# Altium PCB Main_Board_PCB.PcbDoc
Units mil, origin at the board's own origin, x right, y up, seen from the top; angles counter-clockwise.
Board outline 5435 x 1500 mil, 4 copper layers (Top Layer, Layer 1, Layer 2, Bottom Layer), stack 23.756 mil thick; 55 components, 28 nets, 237 pads, 73 vias.
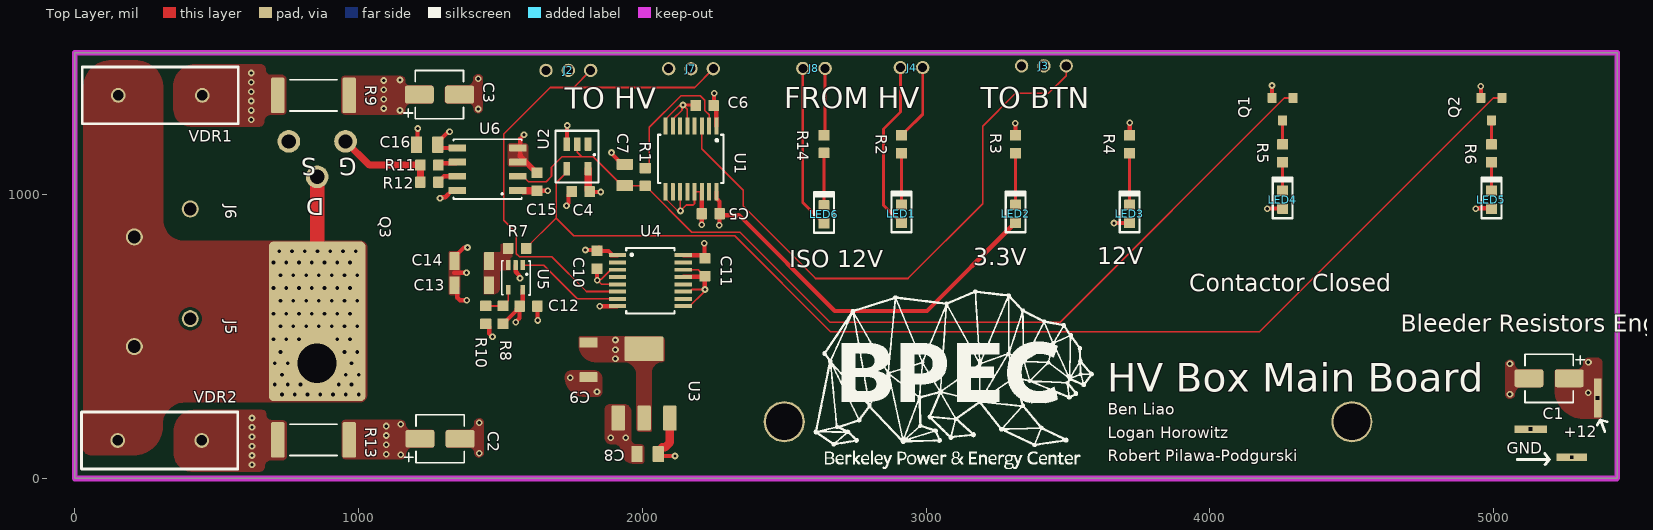
[diagram p0: Top Layer view]
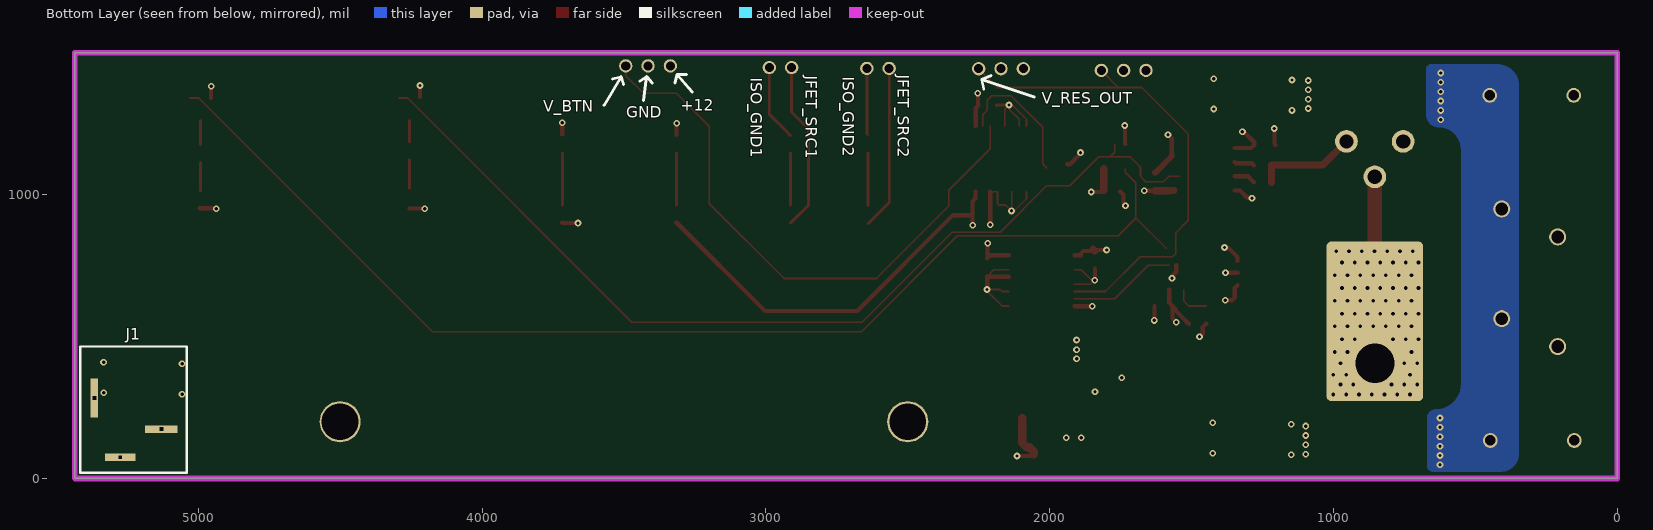
[diagram p1: Bottom Layer view, seen from below]
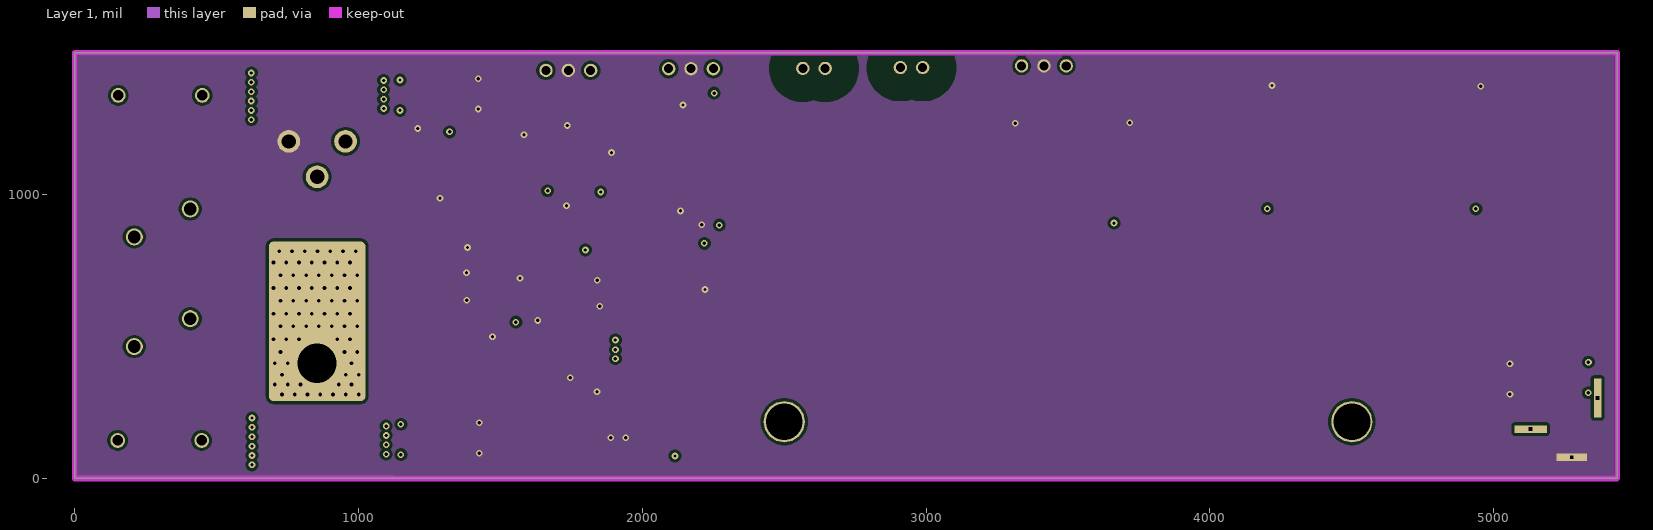
[diagram p2: Layer 1]
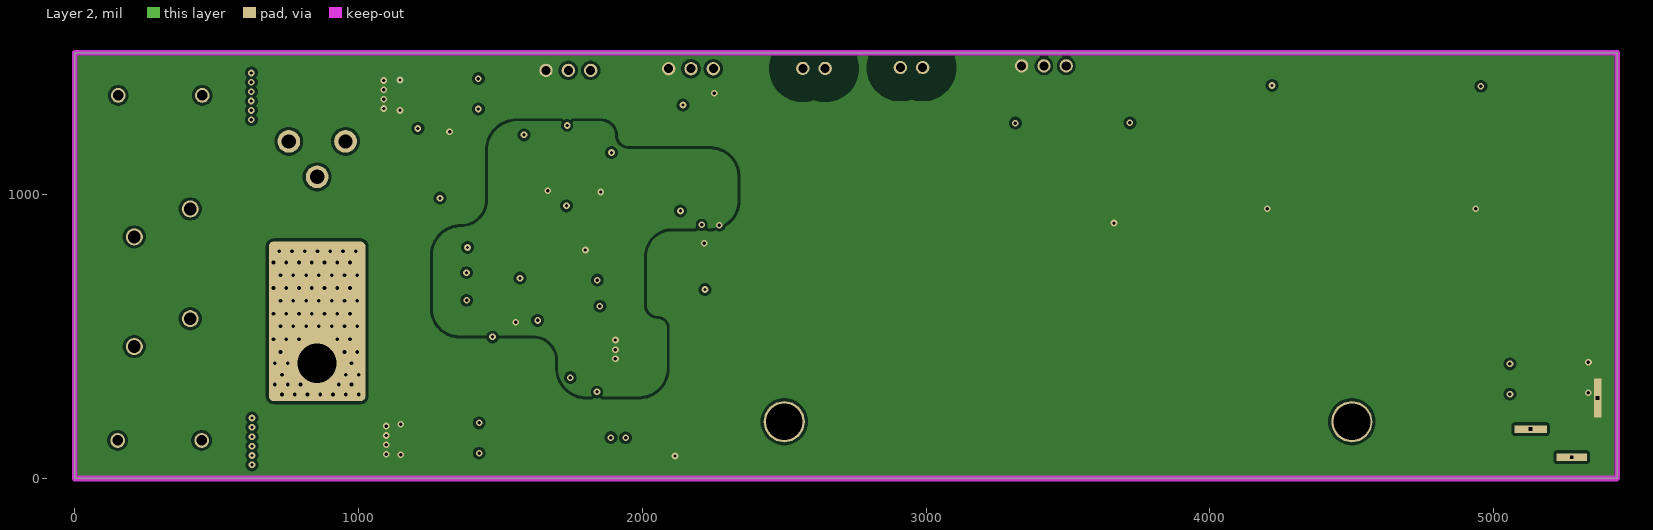
[diagram p3: Layer 2]
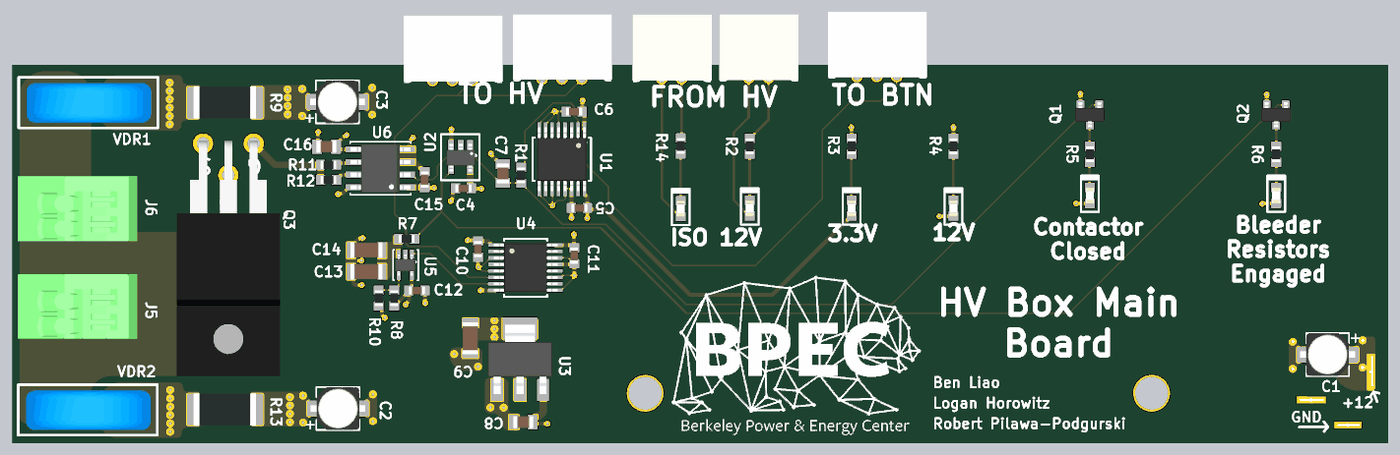
[diagram p4: 3D render of the assembled board from above, using the file's embedded part models]

## Layer stack, top to bottom
Top Solder: solder mask 0.4, Solder Resist, Dk 3.5
Top Layer: signal copper 1.4
Dielectric 2: prepreg 2.8, PP-006, Dk 4.1
Layer 1: signal copper 1.378
Dielectric 1: dielectric 12.6, FR-4, Dk 4.8
Layer 2: signal copper 1.378
Dielectric 3: prepreg 2.8, PP-006, Dk 4.1
Bottom Layer: signal copper 1.4
Bottom Solder: solder mask 0.4, Solder Resist, Dk 3.5

## Board outline
5435,1500 0,1500 0,0 5435,0

## Design rules (kind name [scope] priority, off if disabled: settings)
BoardOutlineClearance [All] p1: gap=9.84 ignorepadtopadclearanceinfootprint=FALSE
Clearance Clearance_HV [InNetClass('High Voltage') vs InNetClass('High Voltage')] p1: gap=96 ignorepadtopadclearanceinfootprint=FALSE
Clearance Clearance_HV_TO_LV [InNetClass('High Voltage') vs InNetClass('Low Voltage')] p2: gap=96 ignorepadtopadclearanceinfootprint=TRUE
Clearance Clearance_HV_TO_ISO [InNetClass('High Voltage') vs InNetClass('Isolated')] p3: gap=96 ignorepadtopadclearanceinfootprint=TRUE
Clearance Clearance_ISO_TO_LV [InNetClass('Isolated') vs InNetClass('Low Voltage')] p4: gap=96 ignorepadtopadclearanceinfootprint=TRUE
Clearance Clearance_Edge [OnLayer('Keep-Out Layer')] p5: gap=0 ignorepadtopadclearanceinfootprint=FALSE
Clearance [All] p6: gap=10 ignorepadtopadclearanceinfootprint=FALSE except(0: Arc-Hole Track-Hole SMDPad-Hole THPad-Hole Via-Hole Fill-Hole Poly-Hole Region-Hole Text-Hole; 5: Arc-Arc Arc-Track Arc-SMDPad Track-Track Track-SMDPad SMDPad-SMDPad; 5.98: SMDPad-Fill SMDPad-Poly SMDPad-Region; 7.87: Via-Via)
ComponentClearance [All] p1: gap=3.94 collisioncheckmode=3 verticalgap=3.94 showdistances=FALSE
Height [All] p1: minheight=0 maxheight=3000 prefheight=500
HoleSize [All] p1: absolutevalues=TRUE maxlimit=248.03 minlimit=7.87 maxpercent=80.000 minpercent=20.000
HoleToHoleClearance [All] p1: gap=19.68 allowstackedmicrovias=TRUE
MinimumAnnularRing [All] p1: minimumring=5.12
MinimumSolderMaskSliver [All] p1 off: minsoldermaskwidth=7.87
PlaneConnect [All] p1: planeconnectstyle=Direct reliefexpansion=20 reliefentries=4 reliefconductorwidth=10 reliefairgap=10
PolygonConnect [All] p1: connectstyle=Direct reliefconductorwidth=39.37 reliefentries=4 polygonreliefangle="90 Angle" airgapwidth=9.84
RoutingVias [All] p1: holewidth=11.81 width=23.62 viastyle="Through Hole" minholewidth=11.81 minwidth=23.62 maxholewidth=248.03 maxwidth=393.7
SolderMaskExpansion [All] p1: expansion=4 istentingtop=FALSE
Width [All] p1: maxlimit=393.7 minlimit=5 preferedwidth=6
24 further rules are at their usual default settings.

## Classes and differential pairs
net class Isolated: ISO_GND1 ISO_GND2 JFET_SOURCE1 JFET_SOURCE2 NetLED1_1 NetLED6_1
net class "Low Voltage": +3V3 +12 GND NetC13_2 NetJ5_1 NetJ5_2 NetLED2_1 NetLED3_1 NetLED4_1 NetLED5_1 NetQ1_1 NetQ2_1 NetQ3_1 NetR1_1 NetR8_2 NetR11_1 NetR12_1 NetS1_1 NetU4_7 V_BTN V_CONT V_RES V_RES_OUT

## Components (designator, comment, footprint, x,y, rotation, side; value= is the part's Value field where it differs from the comment)
C1 "10uF" ALUM_CAP 5195,353 r0 top
C2 "10uF" ALUM_CAP 1287,140 r180 top
C3 "10uF" ALUM_CAP 1285,1353 r180 top
C4 "1 uF, 50 V" 0603_CAP 1751,1011 r0 top
C5 "1 uF, 50 V" 0603_CAP 2209,933 r0 top
C6 "1 uF, 50 V" 0603_CAP 2188,1314 r0 top
C7 "47nF,0805" 0805_CAP 1938,1107 r270 top
C8 "10uF" 0805_CAP 1981,86 r0 top
C9 "22uF" 1206_CAP 1810,357 r90 top
C10 "1 uF, 50 V" 0603_CAP 1840,739 r90 top
C11 "1 uF, 50 V" 0603_CAP 2220,713 r90 top
C12 "1 uF, 50 V" 0603_CAP 1630,607 r180 top
C13 "470nF,1206" 1206_CAP 1338,681 r0 top
C14 "470nF,1206" 1206_CAP 1338,766 r0 top
C15 "100nF" 0603_CAP 1629,1077 r270 top
C16 "10uF" 0805_CAP 1204,1176 r0 top
J1 "J_Barrel_Jack" PWR_JACK 5228,284 r180 bottom
J2 "JST3" JST_3 1660.3,1438 r0 top
J3 "JST3" JST_3 3336.3,1454 r0 top
J4 "JST2" JST_2 2909,1448 r0 top
J5 "Phoenix" PHOENIX_CONNECTOR_SMALL 209.76,464.71 r90 top
J6 "Phoenix" PHOENIX_CONNECTOR_SMALL 209.76,851.38 r90 top
J7 "JST3" JST_3 2092.6,1444 r0 top
J8 "JST2" JST_2 2565.3,1445 r0 top
LED1 "Red" 0603_LED 2913,964 r270 top
LED2 "Red" 0603_LED 3315,964 r270 top
LED3 "Red" 0603_LED 3717,964 r270 top
LED4 "Blue" 0603_LED 4256,1014 r270 top
LED5 "Blue" 0603_LED 4992,1014 r270 top
LED6 "Red" 0603_LED 2640,962 r270 top
Q1 "Logic FET" SOT23 4256,1262 r0 top
Q2 "Logic FET" SOT23 4992,1262 r0 top
Q3 "FET" TO-220 954,1188 r180 top
R1 "10k" 0603_RES 2010,1094 r270 top
R2 "3.3k" 0603_RES 2913,1209 r270 top
R3 "698" 0603_RES 3315,1209 r270 top
R4 "3.3k" 0603_RES 3717,1209 r270 top
R5 "3.3k" 0603_RES 4256,1177 r270 top
R6 "3.3k" 0603_RES 4992,1177 r270 top
R7 "100k" 0603_RES 1590,811 r180 top
R8 "1kOhm, 0.1%" 0603_RES 1509,545 r90 top
R9 "0, 2512" 2512_RES 841,1350 r0 top
R10 "3kOhm, 0.1%" 0603_RES 1448,608 r270 top
R11 "51" 0603_RES 1281,1104 r180 top
R12 "51" 0603_RES 1281,1044 r180 top
R13 "0, 2512" 2512_RES 841,136 r0 top
R14 "3.3k" 0603_RES 2640,1210 r270 top
U1 "U_Level_Shifter" TSSOP-16 2171,1126 r270 top
U2 "Inverter" SOT23-5 1771,1135 r270 top
U3 "LDO" SOT223-3 2006,213 r270 top
U4 "U_Level_Shifter" TSSOP-16 2028,697 r0 top
U5 "U_Comparator" SC70 1578.6,751.6 r180 top
U6 "U_Isolated_Gate_Drive" GATE_DRIVER 1454.5,1090 r180 top
VDR1 "Varistor, 47V" VARISTOR 301,1350 r0 top
VDR2 "Varistor, 47V" VARISTOR 299,134 r0 top

## Footprints (in the part's own frame and the unit in brackets; to place one, negate y for a bottom-side part, rotate by r counter-clockwise, add the part's x,y. Pads: shape width x height; smd on the part's side, far side on the other; paste and mask are expansions set on the pad)
0603_CAP [mil] "SMD 0603 Capacitor Footprint"
  rrect10% 37x39 smd: 1(0,0) 2(63,0)
  body extent 0,-15 63,16, height 32
0603_LED [mil] "SMD 0603 LED Footprint"
  rrect10% 37x39 smd: 1(0,0) 2(63,0)
  silkscreen extent -47,-35 96,35, body extent 0,-16 63,16, height 43
0603_RES [mil] "SMD 0603 Resistor Footprint"
  rrect10% 37x39 smd: 1(0,0) 2(63,0)
  body extent 0,-16 63,16, height 18
0805_CAP [mil] "SMD 0805 Capacitor Footprint"
  rrect10% 39x57 smd: 1(0,0) 2(75,0)
  body extent -2,-25 77,25, height 49
1206_CAP [mil] "1206 SMD Capacitor Footprint"
  rrect10% 35x63 smd: 1(0,0) 2(122,0)
  body extent -2,-31 124,32, height 62
2512_RES [mil] "2512 Resistor Footprint"
  rrect25% 49x125 smd: 1(-126,0) 2(126,0)
  silkscreen extent -83,-55 83,55, body extent -125,-63 123,63, height 24
ALUM_CAP [mil] "25 V Aluminum Electrolytic Cap"
  rrect25% 102x63 smd: 1(-71,0) 2(71,0)
  silkscreen extent -85,-85 125,85, body extent -108,-84 108,85, height 213
GATE_DRIVER [mil] "Isolated Gate Driver Footprint 8-SOIC"
  rrect10% 61x24 smd: 1(-106.5,75) 2(-106.5,25) 3(-106.5,-25) 4(-106.5,-75) 5(106.5,-75) 6(106.5,-25) 7(106.5,25) 8(106.5,75)
  silkscreen extent -120,-105 120,105, body extent -118,-97 118,97, height 69
JST_2 [mil] "2-pin JST Header Footprint, PH series"
  round 47 hole 32: 1(0,0) 2(78.7,0)
  body extent -116,-14 197,252, height 197
JST_3 [mil] "3-pin JST Header Footprint, PH series"
  round 47 hole 32: 1(0,0) 2(78.7,0) 3(157.4,0)
  body extent -115,-10 277,256, height 197
PHOENIX_CONNECTOR_SMALL [mil]
  round 60 hole 45: 1(0,0) 2(98.4,-197)
  body extent -49,-285 207,188, height 516
PWR_JACK [mil] "Barrel Jack Footprint"
  rrect10% 27x138 hole 12 square: 1(-138,0)
  rrect10% 107x27 hole 12 square: 2(-47,-209)
  rrect10% 114x27 hole 12 square: 3(98,-110)
  silkscreen extent -188,-264 187,181, body extent -179,-253 175,168, height 551
SC70 [mil] "IC 6-pin SC70 Footprint"
  rrect10% 16x35 smd: 1(0,0) 2(25.6,0) 3(51.2,0) 4(51.2,86.6) 5(0,86.6)
  silkscreen extent -26,-16 74,105, body extent -13,3 65,85, height 43
SOT23 [mil] "SOT23 Footprint"
  rrect10% 31x35 smd: 1(0,0) 2(37,79) 3(-37,79)
  body extent -59,-9 59,89, height 47
SOT23-5 [mil] "SOT23 5-pin footprint"
  rrect10% 47.6x23.2 smd: 1(-43.3,37.4) 2(-43.3,0) 3(-43.3,-37.4) 4(43.3,-37.4) 5(43.3,37.4)
  silkscreen extent -90,-77 92,74, body extent -52,-56 58,58, height 57
SOT223-3 [mil] "SOT223 3-pin Footprint"
  rrect10% 87x47 smd: 1(0,-91) 2(0,0) 3(0,91)
  rrect10% 87x138 smd: 4(-244,0)
  body extent -259,-128 17,128, height 65
TO-220 [mil] "Power FET Footprint TO-220-3"
  round 80 hole 50: 1(0,0) 2(100,125) 3(200,0)
  round 25 hole 13 paste-99999 mask+4: 4(-46,892) 4(-46,822) 4(-41,742) 4(-41,652) 4(-41,562) 4(-41,472) 4(-36,387) 4(-21,857) 4(-21,782) 4(-16,697) 4(-16,607) 4(-16,517) 4(-16,427) 4(-1,892) 4(-1,822) 4(4,742) 4(4,652) 4(4,562) 4(4,472) 4(9,387) 4(24,857) 4(29,697) 4(29,607) 4(29,517) 4(29,427) 4(44,892) 4(49,652) 4(49,562) 4(49,472) 4(54,387) 4(74,607) 4(74,427) 4(74,517) 4(89,892) 4(94,652) 4(94,562) 4(94,472) 4(99,387) 4(119,607) 4(119,427) 4(119,517) 4(134,892) 4(139,652) 4(139,472) 4(139,562) 4(144,387) 4(159,857) 4(164,607) 4(164,697) 4(164,427) 4(164,517) 4(179,892) 4(184,652) 4(184,472) 4(184,562) 4(189,387) 4(204,857) 4(204,782) 4(209,607) 4(209,697) 4(209,427) 4(209,517) 4(224,822) 4(224,892) 4(229,652) 4(229,742) 4(229,472) 4(229,562) 4(234,387) 4(249,857) 4(249,782) 4(254,607) 4(254,697) 4(254,427) 4(254,517)
  rrect10% 341x563 hole 138 copper offset 0,-148 paste-99999: 4(100,782)
  body extent -105,-10 305,921, height 181
TSSOP-16 [mil] "TSSOP-16 Footprint"
  rrect10% 61x14 smd mask+3: 1(-116,89.8) 2(-116,64.2) 3(-116,38.6) 4(-116,13) 5(-116,-12.6) 6(-116,-38.2) 7(-116,-63.8) 8(-116,-89.4) 9(116,-89.4) 10(116,-63.8) 11(116,-38.2) 12(116,-12.6) 13(116,13) 14(116,38.6) 15(116,64.2) 16(116,89.8)
  silkscreen extent -85,-116 85,115, body extent -126,-98 126,98, height 43
VARISTOR [mil] "Varistor Footprint"
  round 52 hole 37: 1(-148,0) 2(148,0)
  silkscreen extent -275,-100 275,100, body extent -244,-80 248,78, height 610

## Part data
C1 C2 C3: library part C_10uF_AlElec, "Capacitor SMD Aluminum Electrolytic 10 uF"
C4 C5 C6 C10 C11 C12: library part C_1uF_0603, "Capacitor SMD MLCC 1 uF, 0603, 50 V"
C7: library part C_47nF_0805, "Capacitor SMD MLCC 47 nF 0805, C0G/NP0"
C8 C16: library part C_10uF_0805, "Capacitor SMD MLCC 10 uF 0805"
C9: library part C_22uF_1206, "Capacitor SMD MLCC 22 uF 25 V 1206"
C13 C14: library part C_470nF_1206, "Capacitor SMD MLCC 470 nF 1206, C0G/NP0"
C15: library part C_100nF_0603, "Capacitor SMD MLCC 100 nF 0603"
J1: "Jack 12 V Barrel Jack Power Plug"
J2 J3 J7: library part J_JST_3, "Jack JST 3-pin"
J4 J8: library part J_JST_2, "Jack JST 2-pin", System=Connector
J5 J6: library part J_Phoenix_Small, "Phoenix Connector, Female, 2 position, 2 A, 250 V per position"
LED1 LED2 LED3 LED6: library part LED_0603_Red, "LED SMD 0603 Red"
LED4 LED5: library part LED_0603_Blue, "LED SMD 0603 Blue"
Q1 Q2: library part Q_NFET, "N-Channel Logic FET SOT23-3"
Q3: library part Q_NFET_150V, "N-Channel Power FET 150 V 100 A"
R1: library part R_10kOhm_0603_1%, "Resistor 10 kOhm 0603 1%"
R2 R4 R5 R6 R14: library part R_3300Ohm_0603_1%, "Resistor 3.3 kOhm 0603 1%"
R3: library part R_698Ohm_0603_0.5%, "Resistor 698 Ohm 0603 0.5%"
R7: library part R_100kOhm_0603_0.5%, "Resistor 100 kOhm 0603 0.5%"
R8: library part R_1kOhm_0603_0.1%, "Resistor 1 kOhm 0603 0.1%"
R9 R13: library part R_0Ohm_2512, "Resistor 0 Ohm 2512"
R10: library part R_3kOhm_0603_0.1%_1, "Resistor 3 kOhm 0603 0.1%"
R11 R12: library part R_51Ohm_0603_1%, "Resistor 51 Ohm 0603 1%"
U1 U4: "IC 6-in-1 level shifter"
U2: library part U_Inverter_1, "IC Single Inverter"
U3: library part U_LDO_12V_3V3, "IC LDO Fixed Output 3.3V, input up to 12 V, SOT223-3 Package"
U5: "IC 3.3V Comparator Push-Pull"
U6: "IC Isolated Gate Drive 3-15 V Output Supply Split Output"
VDR1 VDR2: library part VDR_47V, "Varistor, 47 V, 500 A, 10 mm Disc Through-Hole"

## Free pads (board coordinates)
  round 145 hole 130: 1(2500,200) 2(4500,200)

## Via types
v1: diameter 23.62, hole 11.81, Top Layer to Bottom Layer, 73 vias

## Nets (pads, with @x,y where several pads share a name; then routed paths per layer and width w, separated by ;. In a path a pad name is that pad's centre, name@x,y a point inside that pad or via, vN(x,y) a via of type N, cw(c..) or ccw(c..) an arc to the next point about the centre after c; other vN are vias at no path point)
+3V3: C4.2 C5.2 C9.2 C10.2 C12.2 C15.2 LED2.2 R8.1 U1.16 U2.5 U3.2 U3.4 U4.1 U5.5 U6.1 | length 2008.6
  Top Layer w15: R8.1 1510,545 1521,556 1521,557 1556,592 1556,597 C12.2@1566,607 ; v1(1554,551) 1554,552 1567,565 C12.2 1578,618 1578,627.19 1578.6,627.79 U5.5 ; C15.2 1629,1013.74 v1(1666.15,1013.74) ; v1(1799.21,805.23) 1836.77,805.23 cw(c1836.77,802) C10.2 ; C4.2@1809.3,1015.7 ccw(c1815.26,1015.7) 1815.26,1009.74 v1(1853.15,1009.74) ; C10.2@1841,802 1880.21,802 1889,793.21 1889,787.3 1889.5,786.8 U4.1 ; U1.16 2260.8,987.5 2272,976.3 C5.2 2272,928 2340,928 2678,590 3003,590 3314,901 LED2.2 LED2.2@3316,901 ; v1(2271,892.81) 2271.5,893.31 C5.2@2271.5,928
  Top Layer w25: U6.1 1578.5,1015 1579.5,1014 C15.2 ; U2.5 1809.3,1090.8 C4.2@1809.3,1015.7 ; C10.2 1841,802 1847,808 C10.2@1847,809
  other v1: 1905,422 1905,454 1905,488
+12: C1.2 C2.2 C3.2 C6.2 C8.2 C11.2 C16.2 J1.1 J2.1 J3.1 J7.1 LED3.2 LED4.2 LED5.2 R9.2 R13.2 U1.1 U3.3 U4.16 U6.5 | length 766.9
  Top Layer w15: v1(1320.68,1221.38) 1319.03,1219.73 1313.73,1219.73 1279,1185 C16.2 1290,1165 U6.5 ; C8.2 2062.62,79.38 v1(2114.68,79.38) ; U4.16 2144.5,786.3 2209.7,786.3 C11.2@2219.2,776.8 ; v1(2218.4,828.58) 2219.2,827.78 C11.2@2219.2,776.8 ; C11.2 C11.2@2219.2,776.8 ; v1(2253,1358) 2252,1357 2252,1315 C6.2 2260.3,1304.7 2260.3,1242.5 U1.1 ; v1(3662,900) 3716,900 LED3.2 ; v1(4202,951) LED4.2 ; v1@4941,952 LED5.2@4995,952
  Top Layer w30: C8.2 2056,95 2070.43,109.43 2079.43,109.43 2097,127 U3.3
  other v1: 1149,84 1097.16,85.68 1097.16,118.68 1097.16,151.68 1097.16,184.68 1149,191 5333,302 5333.64,409.64 4937,950 1146,1297 1088.16,1303.68 1088.16,1336.68 1088.16,1369.68 1088.16,1402.68 1146,1404
GND: C1.1 C2.1 C3.1 C4.1 C5.1 C6.1 C7.1 C8.1 C9.1 C10.1 C11.1 C12.1 C13.1 C14.1 C15.1 C16.1 J1.2 J2.2 J3.2 J7.2 Q1.3 Q2.3 Q3.3 R3.1 R4.1 R10.2 U1.5 U1.7 U1.8 U1.9 U1.11 U1.13 U1.14 U2.3 U3.1 U4.3 U4.5 U4.8 U4.9 U4.11 U4.13 U4.14 U5.2 U6.3 U6.4 U6.8 | length 2372.7
  Top Layer w6: U4.5 1855.83,684.4 1841.23,699 v1(1841,699) 1844.37,702.37 1855.27,702.37 1888.5,735.6 U4.3 ; U1.9 2081.6,986.5 2121.87,946.23 ; U1.8 2081.6,1265.5 2128.73,1312.63 v1@2139.63,1312.63 ; U1.7 2107.2,1265.5 2139.63,1297.93 v1@2139.63,1312.63 ; U1.11 2133.52,1009.28 2133.52,943.57 v1(2134.23,942.86) 2155.38,964 2179,964 2184,969 U1.13 U1.14 ; U4.9 2167.5,607.6 2214.32,654.42 2214.32,654.95 2220.39,661.02 v1(2220.39,665.78) 2174.48,665.78 2167.5,658.8 U4.11 ; U4.14 2196.4,735.6 C11.1@2219,713 ; U1.5 2158.4,1300.6 v1(2143,1316) v1@2139.63,1312.63 ; C11.1@2216.5,710.5 C11.1@2219,713 ; C11.1@2220.19,712.81 2219.19,712.81 C11.1@2219,713
  Top Layer w10: v1(2143,1316) 2186,1316 C6.1
  Top Layer w15: C16.1 1207.28,1179.28 1207.28,1231.79 v1(1208.93,1233.44) ; v1(1287,988) 1290,991 1305.5,991 1329.5,1015 U6.8 ; 1337.51,724.56 1378,724.56 1378,724 1380,724 v1(1380,725) ; C13.1 1348,671 1348,637 1357,628 v1(1381,628) ; C14.1 1338,780 1372,814 v1(1384,814) ; R10.2 1449,545 1460,534 1460,511 v1(1472,499) ; U5.2 1553.5,751.1 1553.5,728.51 1567.35,714.66 1567.35,707.65 v1(1569,706) ; 1570,1140 1570,1198 v1(1583,1211) ; C12.1 1630.5,606.5 1630.5,557.5 v1(1631,557) ; v1(1732.45,960.72) 1732.45,963.06 1740,970.61 1740,1000 C4.1 ; U2.3 1734.3,1179 1734.3,1243.3 v1(1735,1244) ; v1@1840,704 C10.1 ; v1(1850,607) 1850.3,607.3 1911.7,607.3 U4.8 ; v1(1890.93,1148.44) 1892.58,1146.79 1892.58,1143.42 1929,1107 C7.1 ; U4.13 2144.5,710.5 C11.1@2216.5,710.5 ; v1(2209,894) C5.1 2209,986.9 2209.6,987.5 U1.14 ; C11.1@2220.19,712.81 2220.19,665.98 v1(2220.39,665.78) ; R3.1@3314.36,1211.16 v1(3314.36,1252.16) ; R4.1@3717.68,1212.04 v1(3717.68,1253.04) ; Q1.3@4218.68,1344.04 v1(4218.68,1385.04) ; Q2.3@4954.68,1341.04 v1(4954.68,1382.04)
  Top Layer w20: 1570,1140 1570,1135 1628,1077 C15.1
  other v1: 1425,89 1940.93,143.44 1889,144 1425,196 5057,297 1839.93,305.44 1745.93,355.44 5057,404 1422,1302 1422,1409
ISO_GND1: J4.2 R2.1 | length 270.5
  Top Layer w10: R2.1 2914,1209 2927.5,1222.5 2927.5,1223.5 2987.7,1283.7 J4.2
ISO_GND2: J8.2 R14.1 | length 236.7
  Top Layer w6: R14.1 R14.1@2644,1214
  Top Layer w10: R14.1@2644,1214 J8.2
JFET_SOURCE1: J4.1 LED1.2 | length 598.1
  Top Layer w10: J4.1 2909,1291 2850,1232 2850,963 2912,901 LED1.2
JFET_SOURCE2: J8.1 LED6.2 | length 577.5
  Top Layer w10: J8.1 2565.3,972.7 2639,899 LED6.2
NetC13_2: C13.2 C14.2 R7.2 U5.3
NetJ5_1: J5.1 J6.1 Q3.2 Q3.4 VDR1.1 VDR2.1 | length 657
  Top Layer w50: Q3.4@854,406 Q3.2
NetJ5_2: J5.2 J6.2 R9.1 R13.1 VDR1.2 VDR2.2
  other v1: 624.21,48.04 624.21,81.04 624.21,114.04 624.21,147.04 624.21,180.04 624.21,213.04 622.21,1264.04 622.21,1297.04 622.21,1330.04 622.21,1363.04 622.21,1396.04 622.21,1429.04
NetLED1_1: LED1.1 R2.2 | length 182
  Top Layer w10: LED1.1 R2.2
NetLED2_1: LED2.1 R3.2 | length 182
  Top Layer w10: LED2.1 R3.2
NetLED3_1: LED3.1 R4.2 | length 182
  Top Layer w10: LED3.1 R4.2
NetLED4_1: LED4.1 R5.2 | length 100
  Top Layer w10: LED4.1@4256,1023 R5.2@4256,1123
NetLED5_1: LED5.1 R6.2 | length 100
  Top Layer w10: LED5.1 R6.2
NetLED6_1: LED6.1 R14.2 | length 185
  Top Layer w10: LED6.1 R14.2
NetQ1_1: Q1.1 R5.1 | length 76
  Top Layer w10: R5.1@4256,1186 Q1.1
NetQ2_1: Q2.1 R6.1 | length 85
  Top Layer w10: R6.1 Q2.1
NetQ3_1: Q3.1 R11.2 R12.2 | length 358.8
  Top Layer w25: Q3.1 1038,1104 R11.2 R12.2
NetR1_1: R1.1 U1.2 | length 495.1
  Top Layer w6: R1.1 2024.65,1108.65 2024.65,1237.65 2136,1349 2204,1349 2220,1333 2220,1296.77 2235.2,1281.57 U1.2
NetR8_2: R8.2 R10.1 U5.4 | length 126.2
  Top Layer w6: R10.1 R8.2 1510,608 1527.4,625.4 U5.4
NetR11_1: R11.1 U6.6 | length 71.6
  Top Layer w15: R11.1 1287.5,1110.5 1343.5,1110.5 U6.6
NetR12_1: R12.1 U6.7 | length 76.3
  Top Layer w15: R12.1 1281,1045 1301,1065 U6.7
NetU4_7: U4.7 U5.1 | length 382.4
  Top Layer w6: U5.1 1652.4,751.6 1770.8,633.2 U4.7
V_BTN: J3.3 U1.3 | length 2076.8
  Top Layer w6: U1.3 2209.6,1161.4 2355,1016 2355,960 2610,705 2936,705 3199,968 3199,1241 3315,1357 3431,1357 3493.7,1419.7 J3.3
V_CONT: C7.2 Q1.2 R1.2 U2.2 U6.2 | length 3432.8
  Top Layer w6: U6.2@1542.5,1065 U6.2 1579.5,1065 1598.5,1046 1661,1046 1680,1065 1680,1097 1717,1134 1786,1134 ; U2.2 1771,1149 1786,1134 ; Q1.2 4262.41,1341 3472.41,551 2661,551 2344,868 2174,868 2011,1031 R1.2 R1.2 1938.95,1031.05 C7.2 1929,1032 1827,1134 1786,1134
V_RES: Q2.2 R7.1 U2.4 | length 4180.3
  Top Layer w6: R7.1 1590,812 1695.5,917.5 ; U2.4 1733.6,1079.5 1696,1041.9 1696,917 1758,855 2325,855 2663,517 4174.41,517 4997.96,1340.55 Q2.2@5029,1340.55
V_RES_OUT: J2.3 J7.3 U4.6 | length 1770.9
  Top Layer w6: J2.3 1757.7,1378 ; U4.6 1803.2,658.8 1681,781 1567,781 1556,792 1556,865 1511,910 1511,1214 1675,1378 1757.7,1378 ; J7.3 2184,1378 1757.7,1378
pads on no net: J1.3 U1.4 U1.6 U1.10 U1.12 U1.15 U2.1 U4.2 U4.4 U4.10 U4.12 U4.15

## Polygon pours and split planes (outlines as drawn)
NetJ5_1 on Top Layer "NETJ5_1_L01_P003" (solid, pour order 3): 209,82 ccw(c209,182) 309,182 309,189 cw(c388,189) 388,268 1004,268 ccw(c1004,294) 1030,294 1030,814 ccw(c1006,814) 1006,838 384,838 cw(c384,910) 312,910 312,1374 ccw(c212,1374) 212,1474 129,1474 ccw(c129,1374) 29,1374 29,109 ccw(c56,109) 56,82
+12 on Top Layer "+12_L01_P040" (solid, pour order 40): 5383,220 cw(c5374,220) 5374,211 5315.13,211 cw(c5315.13,311) 5215.13,311 5215.13,376.94 cw(c5223.15,376.94) 5223.15,384.95 5293.13,384.95 ccw(c5293.13,406.95) 5315.13,406.95 cw(c5333.13,406.95) 5333.13,424.95 5367.05,424.95 cw(c5367.05,409) 5383,409
GND on Top Layer "GND_L01_P039" (solid, pour order 39): 1998,52 ccw(c1998,61) 2007,61 2007,108 ccw(c1994,108) 1994,121 1979,121 cw(c1979,140) 1960,140 1960,237 ccw(c1936,237) 1936,261 1885,261 ccw(c1885,243) 1867,243 1867,144 ccw(c1890,144) 1890,121 1899,121 cw(c1899,94) 1926,94 ccw(c1968,94) 1968,52
GND on Top Layer "GND_L01_P038" (solid, pour order 38): 1842,288 ccw(c1842,304) 1858,304 1858,355 ccw(c1832,355) 1832,381 1752,381 ccw(c1752,356) 1727,356 ccw(c1795,356) 1795,288
+12 on Top Layer "+12_L01_P036" (solid, pour order 36): 939,1296 939,1407 cw(c952,1407) 952,1420 1145,1420 cw(c1145,1400) 1165,1400 1165,1297 cw(c1149,1297) 1149,1281 954,1281 cw(c954,1296)
+12 on Top Layer "+12_L01_P035" (solid, pour order 35): 940,83 940,194 cw(c953,194) 953,207 1146,207 cw(c1146,187) 1166,187 1166,84 cw(c1150,84) 1150,68 955,68 cw(c955,83)
NetJ5_2 on Top Layer "NETJ5_2_L01_P033" (solid, pour order 33): 732,1281 ccw(c732,1294) 745,1294 745,1407 ccw(c730,1407) 730,1422 692,1422 cw(c692,1441) 673,1441 ccw(c655,1441) 655,1459 422,1459 ccw(c422,1384) 347,1384 347,1305 ccw(c413,1305) 413,1239 648,1239 ccw(c648,1258) 667,1258 cw(c690,1258) 690,1281
NetJ5_2 on Top Layer "NETJ5_2_L01_P032" (solid, pour order 32): 734,65 ccw(c734,78) 747,78 747,191 ccw(c732,191) 732,206 694,206 cw(c694,225) 675,225 ccw(c657,225) 657,243 424,243 ccw(c424,168) 349,168 349,89 ccw(c415,89) 415,23 650,23 ccw(c650,42) 669,42 cw(c692,42) 692,65
+3V3 on Top Layer "+3V3_L01_P029" (solid, pour order 29): 1990,165 cw(c1990,177) 1978,177 1978,368 ccw(c1937,368) 1937,409 1837,409 cw(c1837,470) 1776,470 1776,496 cw(c1781,496) 1781,501 2062,501 cw(c2062,484) 2079,484 2079,420 cw(c2068,420) 2068,409 ccw(c2068,374) 2033,374 2033,170 cw(c2028,170) 2028,165
GND on Top Layer "GND_L01_P016" (solid, pour order 16): 1421.13,1286.95 ccw(c1421.13,1303.85) 1433.08,1291.9 1438.13,1296.95 1438.13,1410.95 ccw(c1426.06,1410.95) 1434.6,1419.48 1433.13,1420.95 ccw(c1423.48,1411.29) 1423.48,1424.95 1422.13,1424.95 ccw(c1422.13,1405.64) 1408.48,1419.29 1407.13,1417.95 ccw(c1414.38,1410.71) 1404.13,1410.71 1404.13,1406.95 cw(c1382.13,1406.95) 1382.13,1384.95 1314.13,1384.95 ccw(c1314.13,1374.95) 1304.13,1374.95 1304.13,1329.95 ccw(c1313.13,1329.95) 1313.13,1320.95 1387.13,1320.95 cw(c1387.13,1302.95) 1405.13,1302.95 ccw(c1421.13,1302.95)
GND on Top Layer "GND_L01_P024" (solid, pour order 24): 1317,653 ccw(c1324,653) 1324,646 1352,646 ccw(c1352,653) 1359,653 1359,794 ccw(c1352,794) 1352,801 1324,801 ccw(c1324,794) 1317,794
GND on Top Layer "GND_L01_P023" (solid, pour order 23): 1587,1181 cw(c1587,1171) 1597,1171 1597,1110 cw(c1586,1110) 1586,1099 1534,1099 cw(c1534,1107) 1526,1107 1526,1174 cw(c1533,1174) 1533,1181
GND on Top Layer "GND_L01_P019" (solid, pour order 19): 5057.87,419.05 ccw(c5057.87,402.15) 5045.92,414.1 5040.87,409.05 5040.87,295.05 ccw(c5052.94,295.05) 5044.4,286.52 5045.87,285.05 ccw(c5055.52,294.71) 5055.52,281.05 5056.87,281.05 ccw(c5056.87,300.36) 5070.52,286.71 5071.87,288.05 ccw(c5064.62,295.29) 5074.87,295.29 5074.87,299.05 cw(c5096.87,299.05) 5096.87,321.05 5164.87,321.05 ccw(c5164.87,331.05) 5174.87,331.05 5174.87,376.05 ccw(c5165.87,376.05) 5165.87,385.05 5091.87,385.05 cw(c5091.87,403.05) 5073.87,403.05 ccw(c5057.87,403.05)
GND on Top Layer "GND_L01_P017" (solid, pour order 17): 1424.13,73.95 ccw(c1424.13,90.85) 1436.08,78.9 1441.13,83.95 1441.13,197.95 ccw(c1429.06,197.95) 1437.6,206.48 1436.13,207.95 ccw(c1426.48,198.29) 1426.48,211.95 1425.13,211.95 ccw(c1425.13,192.64) 1411.48,206.29 1410.13,204.95 ccw(c1417.38,197.71) 1407.13,197.71 1407.13,193.95 cw(c1385.13,193.95) 1385.13,171.95 1317.13,171.95 ccw(c1317.13,161.95) 1307.13,161.95 1307.13,116.95 ccw(c1316.13,116.95) 1316.13,107.95 1390.13,107.95 cw(c1390.13,89.95) 1408.13,89.95 ccw(c1424.13,89.95)
+12 on Top Layer "+12_L01_P015" (solid, pour order 15): 1149.87,206.05 ccw(c1149.87,189.15) 1137.92,201.1 1132.87,196.05 1132.87,82.05 ccw(c1144.94,82.05) 1136.4,73.52 1137.87,72.05 ccw(c1147.52,81.71) 1147.52,68.05 1148.87,68.05 ccw(c1148.87,87.36) 1162.52,73.71 1163.87,75.05 ccw(c1156.62,82.29) 1166.87,82.29 1166.87,86.05 cw(c1188.87,86.05) 1188.87,108.05 1256.87,108.05 ccw(c1256.87,118.05) 1266.87,118.05 1266.87,163.05 ccw(c1257.87,163.05) 1257.87,172.05 1183.87,172.05 cw(c1183.87,190.05) 1165.87,190.05 ccw(c1149.87,190.05)
+12 on Top Layer "+12_L01_P014" (solid, pour order 14): 1146.87,1419.05 ccw(c1146.87,1402.15) 1134.92,1414.1 1129.87,1409.05 1129.87,1295.05 ccw(c1141.94,1295.05) 1133.4,1286.52 1134.87,1285.05 ccw(c1144.52,1294.71) 1144.52,1281.05 1145.87,1281.05 ccw(c1145.87,1300.36) 1159.52,1286.71 1160.87,1288.05 ccw(c1153.62,1295.29) 1163.87,1295.29 1163.87,1299.05 cw(c1185.87,1299.05) 1185.87,1321.05 1253.87,1321.05 ccw(c1253.87,1331.05) 1263.87,1331.05 1263.87,1376.05 ccw(c1254.87,1376.05) 1254.87,1385.05 1180.87,1385.05 cw(c1180.87,1403.05) 1162.87,1403.05 ccw(c1146.87,1403.05)
+12 on Top Layer "+12_L01_P013" (solid, pour order 13): 5332.13,286.95 ccw(c5332.13,303.85) 5344.08,291.9 5349.13,296.95 5349.13,410.95 ccw(c5337.06,410.95) 5345.6,419.48 5344.13,420.95 ccw(c5334.48,411.29) 5334.48,424.95 5333.13,424.95 ccw(c5333.13,405.64) 5319.48,419.29 5318.13,417.95 ccw(c5325.38,410.71) 5315.13,410.71 5315.13,406.95 cw(c5293.13,406.95) 5293.13,384.95 5225.13,384.95 ccw(c5225.13,374.95) 5215.13,374.95 5215.13,329.95 ccw(c5224.13,329.95) 5224.13,320.95 5298.13,320.95 cw(c5298.13,302.95) 5316.13,302.95 ccw(c5332.13,302.95)
NetC13_2 on Top Layer "NETC13_2_L01_P008" (solid, pour order 8): 1542,818 1542,784 cw(c1538,784) 1538,780 ccw(c1538,777) 1535,777 1535,736 cw(c1533,736) 1533,734 1505,734 ccw(c1505,726) 1497,726 1497,670 cw(c1476,670) 1476,649 1443,649 cw(c1443,651) 1441,651 1441,794 cw(c1445,794) 1445,798 1496,798 ccw(c1496,803) 1501,803 1501,822 cw(c1506,822) 1506,827 1533,827 cw(c1533,818)
+12 on Layer 2 "+12_L03_P031" (solid, pour order 31): 11,10 11,1489 5423,1489 5423,10
+3V3 on Layer 2 "+3V3_L03_P030" (solid, pour order 30): 2085,531 ccw(c2054,531) 2054,562 cw(c2054,611) 2005,611 2005,782 cw(c2105,782) 2105,882 2237,882 ccw(c2237,980) 2335,980 2335,1061 ccw(c2235,1061) 2235,1161 1951,1161 cw(c1951,1209) 1903,1209 ccw(c1854,1209) 1854,1258 1557,1258 ccw(c1557,1158) 1457,1158 1457,981 cw(c1362,981) 1362,886 ccw(c1362,787) 1263,787 1263,597 ccw(c1356,597) 1356,504 1616,504 cw(c1616,416) 1704,416 1704,389 ccw(c1804,389) 1804,289 1985,289 ccw(c1985,389) 2085,389
NetJ5_2 on Bottom Layer "NETJ5_2_L04_P034" (solid, pour order 34): 623,24 650,24 ccw(c650,44) 670,44 670,213 ccw(c639,213) 639,244 cw(c639,333) 550,333 550,1158 cw(c630,1158) 630,1238 ccw(c630,1280) 672,1280 672,1444 ccw(c657,1444) 657,1459 422,1459 ccw(c422,1383) 346,1383 346,89 ccw(c412,89) 412,23
GND on Layer 1 "GND_L02_P037" (solid, pour order 37): 5423,10.95 5423,1489 10,1489 11,1488 11,10

## Keep-outs
Keep-Out Layer:
  lines w20: 0,0 5433,0 5435,2 5435,1500 0,1500 0,0

## Silkscreen, mask and mechanical layers (free items; w line width, h text height)
Top Overlay:
  drawing of 34 lines, arcs and shapes, not listed
  text "TO BTN" at 3191.7,1305 h75
  text "FROM HV" at 2499.73,1304 h75
  text "TO HV" at 1726.27,1303 h75
  text "12V" at 3603.17,755 h60
  text "3.3V" at 3166.54,751 h60
  text "ISO 12V" at 2517.77,744 h60
  text "Contactor Closed" at 3927.85,660 h60
  text "Bleeder Resistors Engaged" at 4672.6,517 h60
  text "HV Box Main Board" at 3637.5,306 h100
  text "Ben Liao" at 3640.47,224 h40
  text "+12" at 5246,145 h40
  text "Logan Horowitz" at 3640.47,142.66 h40
  text "GND" at 5045,87 h40
  text "Robert Pilawa-Podgurski" at 3640.47,61.33 h40
Bottom Overlay:
  lines w10: 2054,1344 2239,1406 ; 2206,1420 2239,1406 ; 2232,1372 2239,1406 ; 3259,1362 3313,1423 ; 3279,1424 3313,1423 ; 3320,1394 3313,1423 ; 3400,1393 3420,1416 ; 3431,1332 3420,1416 ; 3444,1400 3420,1416 ; 3501,1388 3510,1416 ; 3540,1408 3510,1416 ; 3570,1315 3510,1416
  text "JFET_SRC2" at 2535.97,1423.48 h40 r90
  text "JFET_SRC1" at 2859.34,1419 h40 r90
  text "ISO_GND2" at 2728.34,1416 h40 r90
  text "ISO_GND1" at 3052.34,1412 h40 r90
  text "V_RES_OUT" at 2028,1320.66 h40
  text "+12" at 3299,1296 h40
  text "V_BTN" at 3784,1292.66 h40
  text "GND" at 3491,1271 h40
Mechanical 1:
  lines w5: 4174,1365 4174,1381 4334,1381 4334,1365 ; 4910,1366 4910,1382 5070,1382 5070,1366

## Text inside footprints (layer, text, board x,y; h text height)
Q3: Top Overlay "G   S" at 994,1128 h60 r180; Top Overlay "D" at 879,988 h60 r180